# Altium PCB pcb.PcbDoc
Units mm, origin at the board's own origin, x right, y up, seen from the top; angles counter-clockwise.
Board outline 100 x 44 mm, 2 copper layers (Top Layer, Bottom Layer), stack 1.571 mm thick; 48 components, 19 nets, 166 pads, 87 vias.
Unrouted connection lines stored in the file: 43.
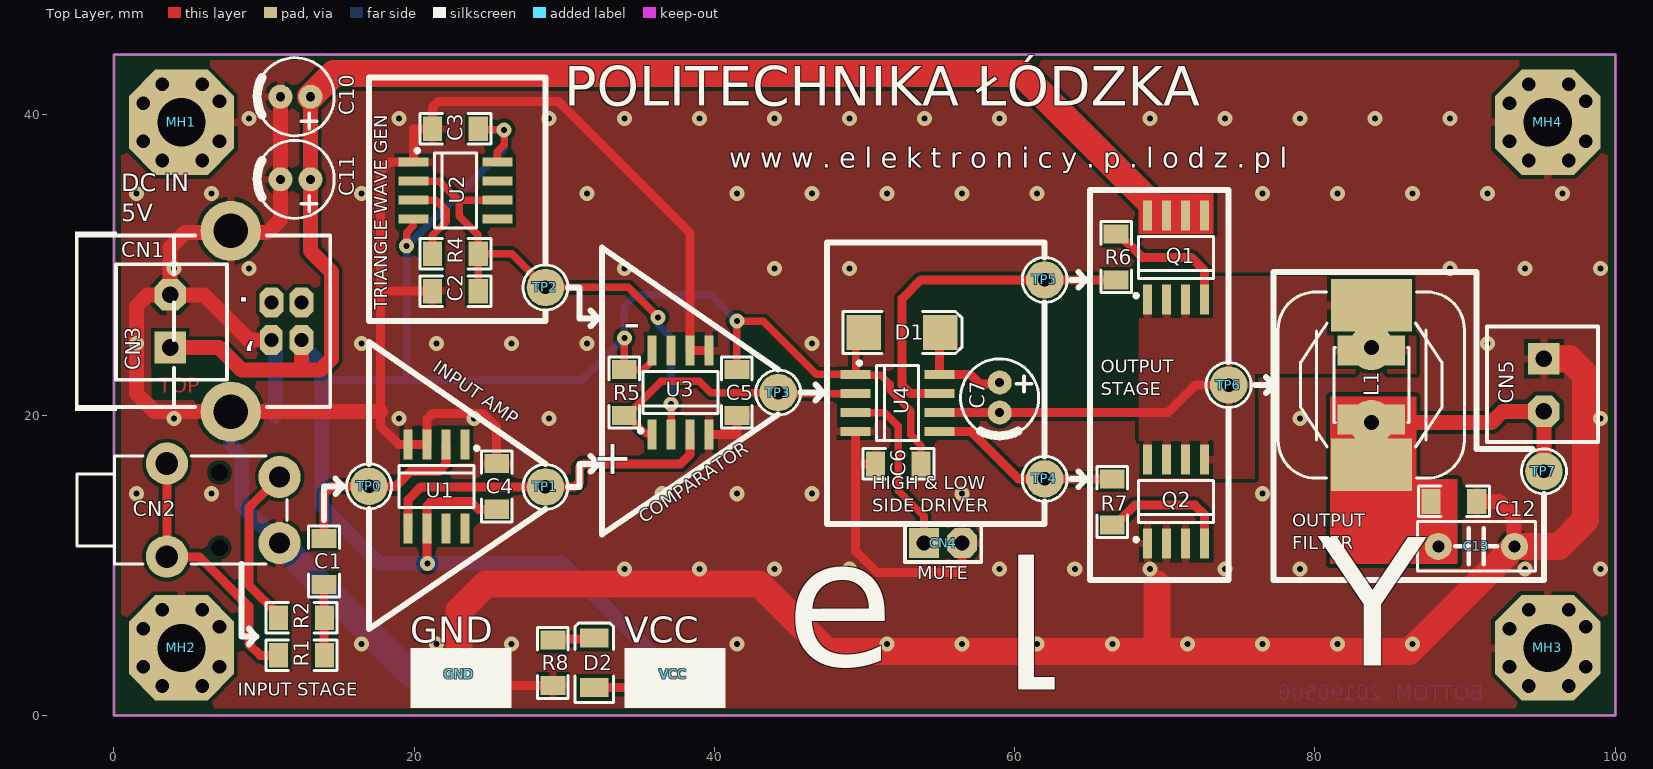
[diagram p0: Top Layer view]
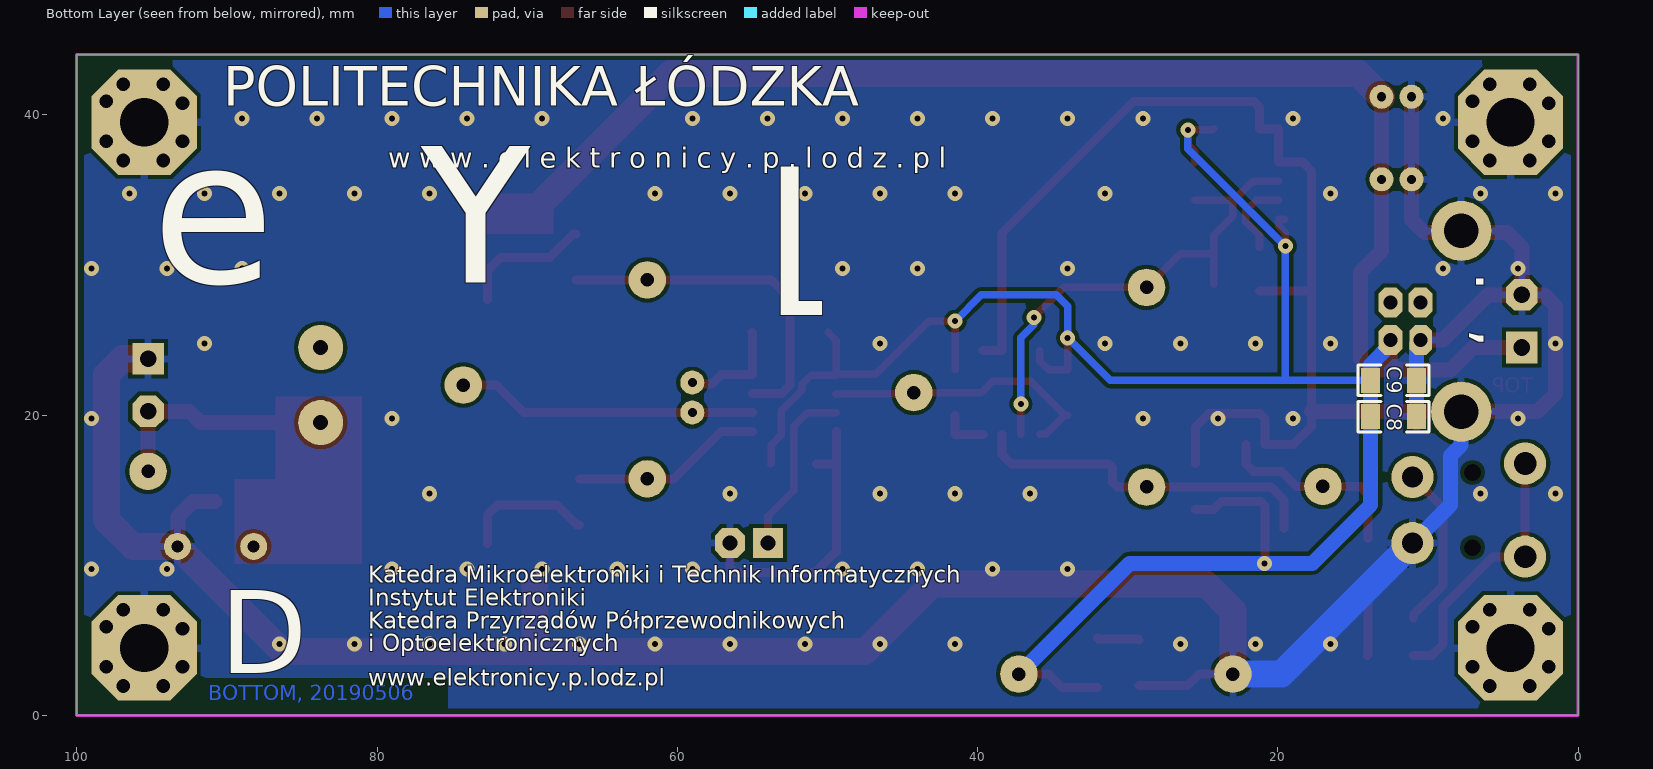
[diagram p1: Bottom Layer view, seen from below]
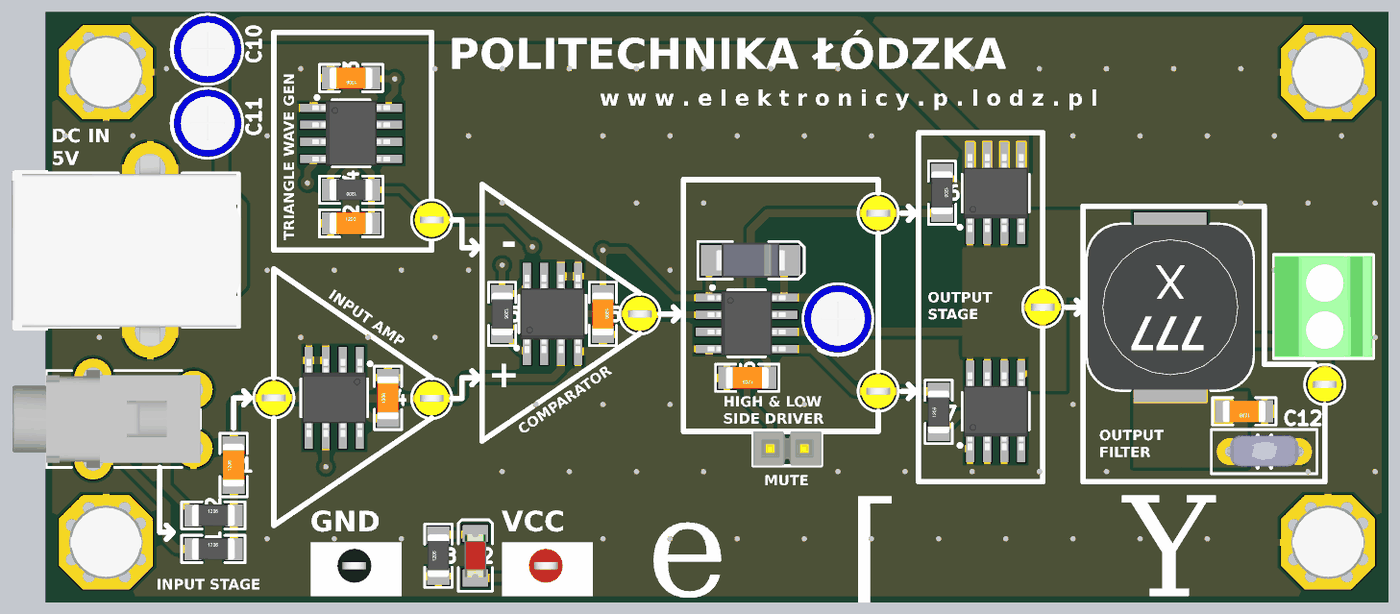
[diagram p2: 3D render of the assembled board from above, using the file's embedded part models]

## Layer stack, top to bottom
Top Solder: solder mask 0.05, Solder Resist, Dk 3.5
Top Layer: signal copper 0.0356
Dielectric 1: dielectric 1.5, FR-4, Dk 4.8
Bottom Layer: signal copper 0.0356
Bottom Solder: solder mask 0.05, Solder Resist, Dk 3.5

## Board outline
0,0 0,44 100,44 100,0

## Design rules (kind name [scope] priority, off if disabled: settings)
Clearance [All] p1: gap=0.254 ignorepadtopadclearanceinfootprint=FALSE except(0: Arc-Hole Track-Hole SMDPad-Hole THPad-Hole Via-Hole Fill-Hole Poly-Hole Region-Hole Text-Hole)
PolygonConnect PolygonConnect_1 [IsVia] p1: connectstyle=Direct reliefconductorwidth=0.254 reliefentries=4 polygonreliefangle="90 Angle" airgapwidth=0.254
PolygonConnect [All] p2: connectstyle=Relief reliefconductorwidth=0.5 reliefentries=4 polygonreliefangle="90 Angle" airgapwidth=0.254
RoomDefinition main [InComponentClass('main')] p1: confinementstyle=ConfineIn formatcopy=TRUE lockcomponents=FALSE outline -48.5,-45.24 139.5,-45.24 139.5,90 -48.5,90
RoutingVias [All] p1: holewidth=0.5 width=1.5 viastyle="Through Hole" minholewidth=0.5 minwidth=1 maxholewidth=0.5 maxwidth=1.5
SolderMaskExpansion [All] p1: expansion=0.102
Width [All] p1: maxlimit=3 minlimit=0.3 preferedwidth=0.5 minimp=50.000000 maximp=50.000000 favimp=50.000000
30 further rules are at their usual default settings.

## Components (designator, comment, footprint, x,y, rotation, side; value= is the part's Value field where it differs from the comment)
C1 "100nF" C1206 14,10.25 r90 top
C2 "1nF" C1206 22.75,28.25 r0 top
C3 "100nF" C1206 22.75,39.066 r180 top
C4 "100nF" C1206 25.5,15.25 r90 top
C5 "100nF" C1206 41.5,21.5 r270 top
C6 "100nF" C1206 52.25,16.75 r180 top
C7 "10uF" CE5x7-2 59,21.165 r270 top
C8 "10nF" C1206 12.3,19.9 r0 bottom
C9 "100nF" C1206 12.3,22.305 r0 bottom
C10 "10uF" CE5x7-2 12.1,41.2 r180 top
C11 "10uF" CE5x7-2 12.1,35.7 r180 top
C12 "470nF" C1206 89.25,14.25 r180 top
C13 "*" CC5 90.75,11.25 r180 top
CN1 "USB B SOCKET" USBB-G 11.5,26.25 r0 top
CN2 "Lumberg 1503-08, Jack 3.5mm TRS" LUMBERG_1503_07 11.04,13.675 r90 top
CN3 "MKDS 1,5/2-5,08" "ARK2/3.5mm PITCH" 3.75,26.25 r90 top
CN4 "CN_2x1" GP_2x1 53.96,11.475 r0 top
CN5 "MKDS 1,5/2-5,08" "ARK2/3.5mm PITCH" 95.25,22 r270 top
D1 "MBRA140T3G" SMA 52.5,25.5 r0 top
D2 "RED" LED1206R 32,3.5 r90 top
GND "Test Point BLACK" CHINA_BLACK 23,2.75 r0 top
L1 "33uH, 2,1A" "UNIVERSAL: DE12xx, DE07xx, DLxx," 83.75,22 r90 top
MH1 "MHOLE 3mm" "3mm screw drill III" 4.5,39.5 r0 top
MH2 "MHOLE 3mm" "3mm screw drill III" 4.5,4.5 r0 top locked
MH3 "MHOLE 3mm" "3mm screw drill III" 95.5,4.5 r0 top locked
MH4 "MHOLE 3mm" "3mm screw drill III" 95.5,39.5 r0 top
Q1 "AO4430" SO8 70.75,30.5 r0 top
Q2 "AO4430" SO8 70.75,14.25 r0 top
R1 "10k" R1206 12.5,4 r0 top
R2 "10k" R1206 12.5,6.5 r0 top
R4 "2k2" R1206 22.75,30.75 r180 top
R5 "2k2" R1206 34,21.5 r270 top
R6 "10R" R1206 66.75,30.524 r270 top
R7 "10R" R1206 66.5,14.21 r90 top
R8 "470R" R1206 29.25,3.5 r90 top
TP0 "Test Point YELLOW" CHINA_YELLOW 17,15.25 r0 top
TP1 "Test Point YELLOW" CHINA_YELLOW 28.75,15.21 r0 top
TP2 "Test Point YELLOW" CHINA_YELLOW 28.75,28.5 r0 top
TP3 "Test Point YELLOW" CHINA_YELLOW 44.25,21.5 r0 top
TP4 "Test Point YELLOW" CHINA_YELLOW 62,15.75 r180 top
TP5 "Test Point YELLOW" CHINA_YELLOW 62,29 r0 top
TP6 "Test Point YELLOW" CHINA_YELLOW 74.25,22 r0 top
TP7 "Test Point YELLOW" CHINA_YELLOW 95.25,16.25 r0 top
U1 "LM386M-1" SO8 21.5,15.25 r180 top
U2 "TLC555CD" SO8 22.75,34.949 r270 top
U3 "LM393DT" SO8 37.75,21.5 r0 top
U4 "IRS2302SPBF" SO8 52.2,20.8 r270 top
VCC "Test Point RED" CHINA_RED 37.25,2.75 r0 top

## Footprints (in the part's own frame and the unit in brackets; to place one, negate y for a bottom-side part, rotate by r counter-clockwise, add the part's x,y. Pads: shape width x height; smd on the part's side, far side on the other; paste and mask are expansions set on the pad)
"3mm screw drill III" [mil]
  oct 275.59x275.59 hole 125.98: 1(0,0)
  round 62 hole 36: 2(-50,-100) 3(55,-100) 4(-100,50) 5(-100,-50) 6(100,-50) 7(100,55) 8(-50,100) 9(55,100)
  body extent -108,-108 108,108, height 79
"ARK2/3.5mm PITCH" [mm]
  rect 2.1x2.1 hole 1.1: 1(-1.75,0)
  oct 2.1x2.1 hole 1.1: 2(1.75,0)
  silkscreen extent -3.9,-3.8 3.8,3.6, body extent -3.8,-3.75 3.7,3.55, height 8.5
C1206 [mil]
  rect 50x65 smd: 1(-60,0) 2(60,0)
  silkscreen extent -93,-40 93,40, body extent -63,-31 63,32, height 39
CC5 [mm]
  round 1.8 hole 0.8: 1(-2.54,0) 2(2.54,0)
  silkscreen extent -3.94,-1.65 3.94,1.65, body extent -2.79,-1.19 2.79,1.09, height 6.35
CE5x7-2 [mm] "Aluminium Electrolytic Capacitor -  Radius: 5mm, Height: 7mm, PinSpacing: 2mm"
  round 1.6 hole 0.6: 1(-1,0) 2(1,0)
  silkscreen extent -2.58,-2.6 2.62,2.6, body extent -2.5,-2.53 2.55,2.53, height 7.33
CHINA_BLACK [mm]
  round 2.5 hole 0.9: 0(0,0)
  silkscreen extent -1.5,-1.5 1.5,1.5, body extent -1.27,-1.27 1.27,1.27, height 4.57
CHINA_RED [mm]
  round 2.5 hole 0.9: 0(0,0)
  silkscreen extent -1.5,-1.5 1.5,1.5, body extent -1.27,-1.27 1.27,1.27, height 4.57
CHINA_YELLOW [mm]
  round 2.5 hole 0.9: 0(0,0)
  silkscreen extent -1.5,-1.5 1.5,1.5, body extent -1.27,-1.27 1.27,1.27, height 4.57
GP_2x1 [mm]
  rect 2x2 hole 1: 1(0,0)
  oct 2x2 hole 1: 2(2.54,0)
  silkscreen extent -1.27,-1.27 3.81,1.27, body extent -1.27,-1.27 3.81,1.27, height 8.38
LED1206R [mm]
  rect 1.27x1.9 smd: 1(-1.65,0) 2(1.65,0)
  silkscreen extent -2.64,-1.27 2.67,1.27, body extent -1.61,-0.8 1.61,0.8, height 1.1
LUMBERG_1503_07 [mm]
  round 1 hole 1.1: M1(-2.5,4) M2(2.5,4)
  round 2.8 hole 1.4: R(2.2,0) S(-2.2,0)
  round 2.8 hole 1.5: T(-3.1,7.5) T(3.1,7.5)
  silkscreen extent -3.6,-0.5 3.6,13.5, body extent -3.62,-0.5 3.62,13.5, height 5.05
R1206 [mil]
  rect 50x65 smd: 1(-60,0) 2(60,0)
  silkscreen extent -93,-40 93,40, body extent -63,-31 63,32, height 39
SMA [mm]
  rect 2.3x2.3 smd: 1(-2.54,0) 2(2.54,0)
  silkscreen extent -3.94,-1.4 4,1.4, body extent -2.6,-1.3 2.6,1.3, height 2.4
SO8 [mm] "Small Outline; 8 Leads; Body Width 3.7 mm; Pitch 1.27 mm"
  rect 0.6x2 smd: 1(-1.905,-2.794) 2(-0.635,-2.794) 3(0.635,-2.794) 4(1.905,-2.794) 5(1.905,2.794) 6(0.635,2.794) 7(-0.635,2.794) 8(-1.905,2.794)
  silkscreen extent -2.79,-2.66 2.5,1.4, body extent -2.4,-2.9 2.4,2.9, height 1.75
"UNIVERSAL: DE12xx, DE07xx, DLxx," [mm]
  rect 2x4.5 smd: 1(2.3,0) 2(-2.3,0)
  round 3 hole 1: 1(2.5,0) 2(-2.5,0)
  rect 2x2.2 smd: 1(3.4,0) 2(-3.4,0)
  rect 3x2.54 smd: 1(5.207,0) 2(-5.207,0)
  rect 3.5x5.4 smd: 1(5.3,0) 2(-5.3,0)
  silkscreen extent -6.2,-6.2 6.2,6.2, body extent -6.15,-6.15 6.15,6.15, height 6.2
USBB-G [mm] "USB-B PCB Angle Socket"
  oct 1.6x2 hole 0.95: 1(1,-1.25) 2(1,1.25) 3(-1,1.25)
  oct 1.5x2 hole 0.95: 4(-1,-1.25)
  round 4 hole 2.3: 5(-3.71,6.02) 6(-3.71,-6.02)
  silkscreen extent -14.07,-5.97 2.92,5.97, body extent -14,-7.47 3,7.42, height 11

## Part data
C1 C2 C3 C4 C5 C6 C8 C9 C12 C13: library part Cap, "Capacitor", ComponentLink1Description=datasheet, ComponentLink2Description=supplier
C7 C10 C11: library part "Cap Pol", "Polarized Capacitor", ComponentLink1Description=datasheet, ComponentLink2Description=supplier
CN1: "USB connector", Published=20-Mar-2006
CN2: library part 1503-08, PackageDocument=2003, ComponentLink1Description="Manufacturer Link", ComponentLink1URL=http://www.cliffuk.co.uk/, DatasheetDocument=2003, DrillAndSlotSize="Corresponds to nominal value.", LatestRevisionDate=15-Jul-2004, LatestRevisionNote="Component Replaced.", PackageReference=S1VS_SSS, PCB_Layout="Complies with manufacturer's recommendation.", Published=15-Jul-2004, Publisher="Altium Limited"
CN3 CN5: "Phoenix Contact MKDS 1,5, PITCH 5,08mm Terminal Block"
D1: "Schottky barrier rectifier: 40V, 1A", PackageReference=SMB, Published=22-Nov-2006
D2: library part LED_RED, "RED LED", Published=04-Apr-2006
L1: library part DE1205-33_UNIVERSAL, "DE1205-33", ComponentLink1Description=datasheet, ComponentLink2Description=supplier, Published=08-Mar-2006, Supplier 1=TME, Supplier Part Number 1=DE1205-33
MH1 MH2 MH3 MH4: library part MHOLE_3MM, "3mm Mounting Hole"
Q1 Q2: "30V N-Channel MOSFET", ComponentLink1Description="Manufacturer Link", ComponentLink1URL=http://www.zetex.com/, ComponentLink2Description=Datasheet, ComponentLink2URL=www.zetex.com/3.0/pdf/BSS138.pdf, DatasheetVersion=Mar-96, PackageDescription="SOT-23; 3 Leads; Body 3.1 x 2.5 mm, inc. leads (LxW max), Alternate Lead Configuration", PackageReference=SOT23, PackageVersion=1996, Published=17-Dec-2003, Publisher="Altium Limited"
R1 R2 R4 R5 R6 R7 R8: library part Res, "Resistor", ComponentLink1Description=datasheet, ComponentLink2Description=supplier, Published=19-Feb-2006
U1: "Dual Operational Amplifier", PackageReference=SO-8, Published=30-May-2007
U2: "Precision LinCMOS™ Timer", Supplier Part Number 1=TLC555CP, Supplier 1=TME, Supplier 2=Farnell, Supplier Part Number 2=1103036
U3: "Low power dual voltage comparators", Published=03-Apr-2006
U4: "Half bridge driver"

## Via types
v1: diameter 1, hole 0.4, Top Layer to Bottom Layer, tented both sides, 87 vias

## Nets (pads, with @x,y where several pads share a name; then routed paths per layer and width w, separated by ;. In a path a pad name is that pad's centre, name@x,y a point inside that pad or via, vN(x,y) a via of type N, cw(c..) or ccw(c..) an arc to the next point about the centre after c; other vN are vias at no path point)
5V: C3.1 C4.1 C5.1 C6.1 C8.2 C9.2 C10.1 C11.1 CN1.1 CN3.1 D1.1 D2.1 Q1.5 Q1.6 Q1.7 Q1.8 R5.1 U1.6 U2.4 U2.8 U3.8 U4.1 VCC.0 | length 234.6
  Top Layer w0.5: v1(19.5,31.25) 19.5,32.155 19.956,32.611 U2.4 U2.4@19.55,33.044 ; C3.1 24.34,39 v1(26,39) 26,38 25.544,37.544 U2.8 ; v1(34,25.135) R5.1 35.275,23.024 35.845,23.594 U3.8 ; C5.1 v1(41.5,26.25) 43.25,26.25 46.795,22.705 U4.1 ; D1.1 49.406,24.946 U4.1 ; C6.1 53.75,16.774 53.75,18 53.065,18.685 53.065,20.298 51.696,21.667 51.696,22.054 51.095,22.655 49.456,22.655 U4.1
  Top Layer w0.6: v1(20.878,10.123) 20.865,10.135 20.865,13.957 21.158,14.25 23.75,14.25 24.274,13.726 C4.1 ; D2.1 34.35,1.85 35.25,2.75 VCC.0
  Top Layer w1: CN3.1 7,24.5 8.5,23 12.5,23 ; CN1.1 12.5,23 ; C10.1 C11.1 13.1,30.924 14.5,29.524 14.5,23.75 13.75,23 12.5,23
  Top Layer w1.8: C10.1 14.646,42.746 60.445,42.746 69.563,33.627 Q1.7@70.377,33.627
  Bottom Layer w0.5: C9.2 19.5,22.305 ; v1(26,39) 26,37.75 v1(19.5,31.25) 19.5,22.305 ; v1(41.5,26.25) 39.75,28 34.75,28 34,27.25 v1(34,25.135) 31.17,22.305 19.5,22.305
  Bottom Layer w1: CN1.1 12.5,24.693 13.824,23.369 C9.2 C8.2 13.824,14.011 17.712,10.123 v1(20.878,10.123) 29.877,10.123 VCC.0
GND: C2.1 C3.2 C4.2 C5.2 C6.2 C8.1 C9.1 C10.2 C11.2 C12.1 C13.1 CN1.4 CN1.5 CN1.6 CN2.S CN3.2 CN4.2 CN5.1 GND.0 MH1.1 MH2.1 MH3.1 MH4.1 Q2.1 Q2.2 Q2.3 R8.1 U1.3 U1.4 U2.1 U3.4 U3.5 U3.6 U4.4 | length 290.8
  Top Layer w0.6: C2.1 17.75,28.25 ; GND.0 25.25,2.75 26.024,1.976 R8.1 ; C4.2 25.5,19.2 24.585,20.115 21.226,20.115 20.865,19.754 U1.3 U1.4 18.972,18.044 17.75,19.266 17.75,20.25 17.75,28.25 ; U3.4 41.5,18.706 C5.2 ; U3.5 U3.6 38.385,32.115 29.603,40.897 21.623,40.897 21.226,40.5 C3.2 19.956,39.066 U2.1 18.354,36.854 17.75,36.25 17.75,28.25 ; U4.4 49.406,16.75 ; C6.2 49.406,16.75 ; CN4.2 56.5,9.851 56.149,9.5 50.835,9.5 49.406,10.929 49.406,16.75
  Top Layer w1: CN1.4 9,25 6,28 CN3.2 ; C10.2 C11.2 11.1,33.005 10.25,32.155 7.905,32.155 CN1.5 7.675,32.155 4.75,32.155 3.75,31.155 CN3.2 ; 17.75,20.25 17.73,20.23 CN1.6 2.705,20.23 1.5,21.435 1.5,27.25 2.25,28 CN3.2 ; C12.1 92.25,14.25 93.25,13.25 93.25,11.29 C13.1
  Top Layer w1.8: GND.0 23,6.976 24.774,8.75 43,8.75 47.5,4.25 68.865,4.25 ; 69.478,8.75 69.478,4.863 68.865,4.25 ; CN5.1 96.946,23.75 98,22.696 98,13 96.25,11.25 C13.1 86.29,4.25 68.865,4.25
  Bottom Layer w1: CN1.6 7.79,18 8.5,17.29 8.5,14.015 CN2.S ; CN1.4 10.776,24.724 C9.1 C8.1
  Bottom Layer w1.8: CN2.S 19.765,2.75 GND.0
  other v1: 16.5,4.76 21.5,4.76 26.5,4.76 41.5,4.76 46.5,4.76 51.5,4.76 56.5,4.76 61.5,4.76 66.5,4.76 71.5,4.76 76.5,4.76 81.5,4.76 86.5,4.76 34,9.76 39,9.76 44,9.76 49,9.76 59,9.76 64,9.76 69,9.76 74,9.76 79,9.76 94,9.76 99,9.76 1.5,14.76 6.5,14.76 36.5,14.76 41.5,14.76 46.5,14.76 56.5,14.76 76.5,14.76 4,19.76 19,19.76 24,19.76 29,19.76 79,19.76 99,19.76 1.5,24.76 16.5,24.76 21.5,24.76 26.5,24.76 31.5,24.76 46.5,24.76 91.5,24.76 4,29.76 9,29.76 34,29.76 44,29.76 49,29.76 89,29.76 94,29.76 99,29.76 1.5,34.76 6.5,34.76 16.5,34.76 31.5,34.76 41.5,34.76 46.5,34.76 51.5,34.76 56.5,34.76 61.5,34.76 76.5,34.76 81.5,34.76 86.5,34.76 91.5,34.76 96.5,34.76 9,39.76 19,39.76 29,39.76 34,39.76 39,39.76 44,39.76 49,39.76 54,39.76 59,39.76 69,39.76 74,39.76 79,39.76 84,39.76 89,39.76
NetC1_1: C1.1 R1.2 R2.2 | length 4.7
  Top Layer w0.6: C1.1 14.012,8.714 14.012,4.012 R1.2
NetC1_2: C1.2 TP0.0 U1.2 | length 13.2
  Top Layer w0.6: C1.2 14,14.75 14.5,15.25 TP0.0 18.766,15.25 19.766,16.25 21.625,16.25 22.135,16.76 U1.2
NetC2_2: C2.2 R4.1 TP2.0 U2.2 U2.6 U3.2 | length 34.1
  Top Layer w0.5: U2.2 21.666,35.584 22.936,34.314 U2.6 ; 23,34.25 23,33.25 24.274,31.976 R4.1 ; C2.2@24.274,28.714 R4.1 ; v1(36.25,26.5) 34.25,28.5 TP2.0 26.5,30.75 R4.1 ; U3.2 v1(37.115,20.75)
  Bottom Layer w0.5: v1(36.25,26.5) 36.25,26 37.115,25.135 v1(37.115,20.75)
NetC7_1: C7.1 D1.2 U4.8 | length 7.1
  Top Layer w0.6: D1.2 54.994,25.454 U4.8 57.045,22.705 57.696,22.054 58.889,22.054 C7.1
NetC7_2: C7.2 L1.1 Q1.1 Q1.2 Q1.3 Q2.5 Q2.6 Q2.7 Q2.8 TP6.0 U4.6 | length 20
  Top Layer w0.6: U4.6 C7.2 70.201,20.165 72.036,22 TP6.0
NetC12_2: C12.2 C13.2 CN5.2 L1.2 TP7.0 | length 16.2
  Top Layer w1: L1.2@83.75,18.6 84.25,19.1 85.85,19.1 86.25,19.5 91.75,19.5 92.5,20.25 CN5.2 TP7.0
NetCN2_R: CN2.R R2.1 | length 11
  Top Layer w0.6: R2.1 10.976,6.69 9,8.667 9,13.835 CN2.R
NetCN2_T: CN2.T R1.1 | length 17.8
  Top Layer w0.6: CN2.T@3.54,16.775 3.54,10.575 3.555,10.56 5.69,10.56 9,7.25 9,4.75 9.75,4 R1.1
NetD2_2: D2.2 R8.2 | length 2.8
  Top Layer w0.6: R8.2 29.313,5.087 31.937,5.087 D2.2
NetQ1_4: Q1.4 R6.1 | length 8.8
  Top Layer w0.6: R6.1 66.941,32.048 68.489,30.5 71.75,30.5 72.655,29.595 Q1.4
NetQ2_4: Q2.4 R7.1 | length 8.9
  Top Layer w0.6: R7.1 66.691,12.686 68.005,14 72,14 72.655,13.345 Q2.4
NetR4_2: R4.2 U2.3 | length 5.3
  Top Layer w0.5: U2.3 21.457,34.314 22.135,33.636 22.135,32.885 21.226,31.976 R4.2@21.226,31.164
NetR5_2: R5.2 TP3.0 U3.1 U4.2 | length 18.9
  Top Layer w0.5: R5.2 R5.2@34.191,19.976 ; U3.1 35.801,18.75 35.417,18.75 R5.2@34.191,19.976 ; U4.2@49.456,21.385 U4.2 44.315,21.435 TP3.0 39.75,21.5 39,22.25 36.465,22.25 R5.2@34.191,19.976
NetR6_2: R6.2 TP5.0 U4.7 | length 23.2
  Top Layer w0.6: U4.7 53.065,21.435 52.5,22 52.5,27.75 53.75,29 TP5.0 R6.2
NetR7_2: R7.2 TP4.0 U4.5 | length 12.8
  Top Layer w0.6: U4.5 57.105,18.895 60.266,15.734 62,15.734 R7.2
NetTP1_0: TP1.0 U1.5 U3.3 | length 23.8
  Top Layer w0.6: U1.5 19.595,14.345 20.46,15.21 TP1.0 30.69,15.21 31,15.52 31,16.5 31.25,16.75 37.75,16.75 38.385,17.385 U3.3
nSD: CN4.1 U4.3 | length 11.7
  Top Layer w0.5: U4.3 51.335,20.165 52.25,19.25 52.25,14.976 53.96,13.266 CN4.1
pads on no net: CN1.2 CN1.3 CN2.M1 CN2.M2 MH1.2 MH1.3 MH1.4 MH1.5 MH1.6 MH1.7 MH1.8 MH1.9 MH2.2 MH2.3 MH2.4 MH2.5 MH2.6 MH2.7 MH2.8 MH2.9 MH3.2 MH3.3 MH3.4 MH3.5 MH3.6 MH3.7 MH3.8 MH3.9 MH4.2 MH4.3 MH4.4 MH4.5 MH4.6 MH4.7 MH4.8 MH4.9 U1.1 U1.7 U1.8 U2.5 U2.7 U3.7

## Polygon pours and split planes (outlines as drawn)
GND on Bottom Layer "Bottom Layer-GND" (solid, remove dead copper, pour order 1): 0.5,0.48 0.5,44 99.5,44 99.5,0.48
GND on Top Layer "Top Layer-GND" (solid, remove dead copper, pour order 2): 0.5,0.48 99.5,0.48 99.5,44 0.5,44
NetC7_2 on Top Layer "Top Layer-No Net" (solid, remove dead copper, pour order 0): 68.25,29.25 68.25,15.75 76,15.75 76,22.75 86.75,22.75 86.75,29.25

## Keep-outs
Keep-Out Layer:
  lines w0.2: 0,0 0,44 100,44 100,0 0,0 ; 0,0 0,0

## Other copper
Top Layer:
  rectangle net NetC12_2: 86.5,10.085 89.5,15.734
  rectangle net NetC12_2: 81,10.085 86.75,21.25
  rectangle net 5V: 68.25,32.048 73.25,34.75
  text "TOP" at 3,21.488 h1
Bottom Layer:
  text "BOTTOM, 20190506" at 91.25,1 h1

## Silkscreen, mask and mechanical layers (free items; w line width, h text height)
Top Overlay:
  rectangle: 34,0.5 40.75,4.5
  rectangle: 19.75,0.5 26.5,4.5
  lines w0.4: 8.5,10.075 8.5,5.25 9.5,5.25 ; 9,4.73 9.5,5.25 ; 9,5.77 9.5,5.25 ; 14,13 14,15.25 14.25,15.25 15.25,15.25 ; 14.75,14.73 15.25,15.25 ; 14.75,15.77 15.25,15.25 ; 17,13.75 17,5.75 28.75,13.75 ; 17,16.75 17,24.856 28.75,16.75 ; 28.75,26.897 28.75,26.25 17,26.25 17,42.47 28.75,42.47 28.75,30.086 ; 30.25,15.21 31,15.21 31,16.75 32.25,16.75 ; 30.25,28.5 31,28.5 31,26.436 32.25,26.436 ; 31.75,16.23 32.25,16.75 ; 31.75,17.27 32.25,16.75 ; 31.75,25.916 32.25,26.436 ; 31.75,26.956 32.25,26.436 ; 44.25,20.04 32.5,12.04 32.5,31.146 44.25,23.04 ; 45.75,21.5 47.25,21.5 ; 46.75,20.98 47.25,21.5 ; 46.75,22.02 47.25,21.5 ; 62,14.25 62,12.75 47.5,12.75 47.5,31.5 62,31.5 62,30.5 ; 62,17.25 62,27.5 ; 63.75,15.734 64.75,15.734 ; 63.75,29 64.75,29 ; 64.25,15.214 64.75,15.734 ; 64.25,16.254 64.75,15.734 ; 64.25,28.48 64.75,29 ; 64.25,29.52 64.75,29 ; 74.25,23.524 74.25,35 74.25,35 65,35 65,9 74.25,9 74.25,20.415 ; 76,22 77.25,22 ; 76.75,21.48 77.25,22 ; 76.75,22.52 77.25,22 ; 94.5,17.75 90.75,17.75 90.75,29.52 77.25,29.52 77.25,22 ; 95.25,14.75 95.25,9 77.25,9 77.25,22
  text "POLITECHNIKA ŁÓDZKA" at 30,39.75 h4.5
  text "w w w . e l e k t r o n i c y . p . l o d z . p l" at 41,36 h2.3
  text "DC IN  / 5V" at 0.5,32.5 h2
  text "-" at 35.085,27.5 h4 r180
  text "." at 9.5,27.25 h3.5 r90
  text "TRIANGLE WAVE GEN" at 18.5,27 h1.5 r90
  text "," at 9.5,25.25 h3.5 r180
  text "INPUT AMP" at 21,22.75 h1.5 r325.5
  text "OUTPUT / STAGE" at 65.734,21.016 h1.5
  text "+" at 35,15.734 h4 r90
  text "HIGH & LOW  / SIDE DRIVER" at 50.5,13.25 h1.5
  text "COMPARATOR" at 35.5,12.5 h1.5 r34.5
  text "OUTPUT / FILTER" at 78.5,10.75 h1.5
  text "MUTE" at 53.5,8.75 h1.5
  text "GND" at 19.75,4.25 h3
  text "VCC" at 34,4.25 h3
  text "INPUT STAGE" at 8.25,1 h1.5
  text "e" at 44.75,0.5 h14.7
  text "[" at 59.25,0.5 h14.7
  text "Y" at 80.25,0.5 h14.7
Bottom Overlay:
  text "POLITECHNIKA ŁÓDZKA" at 90.25,39.75 h4.5
  text "w w w . e l e k t r o n i c y . p . l o d z . p l" at 79.25,36 h2.3
  text "." at 7.75,29.5 h5 r90
  text "," at 7.75,25.75 h5 r90
  text "[" at 54.25,25 h18
  text "Y" at 77.5,25 h20
  text "e" at 95,25 h20
  text "Katedra Mikroelektroniki i Technik Informatycznych" at 80.57,8.461 h1.9
  text "Instytut Elektroniki" at 80.57,6.937 h1.9
  text "Katedra Przyrządów Półprzewodnikowych" at 80.57,5.413 h1.9
  text "i Optoelektronicznych" at 80.57,3.889 h1.9
  text "www.elektronicy.p.lodz.pl" at 80.57,1.603 h1.9
  text "D" at 90.476,0.968 h9.5

## Dimensions
95.5,39.5 to 95.5,4.5 on Mechanical 1
95.5,39.5 to 4.5,39.5 on Mechanical 1
100,44 to 100,0 on Mechanical 1
0,0 to 100,44 on Mechanical 1